# Altium PCB PCB1.PcbDoc
Units mil, origin at the board's own origin, x right, y up, seen from the top; angles counter-clockwise.
Board outline 3600 x 2800 mil, 2 copper layers (Top Layer, Bottom Layer), stack 61.756 mil thick; 47 components, 39 nets, 211 pads, 72 vias.
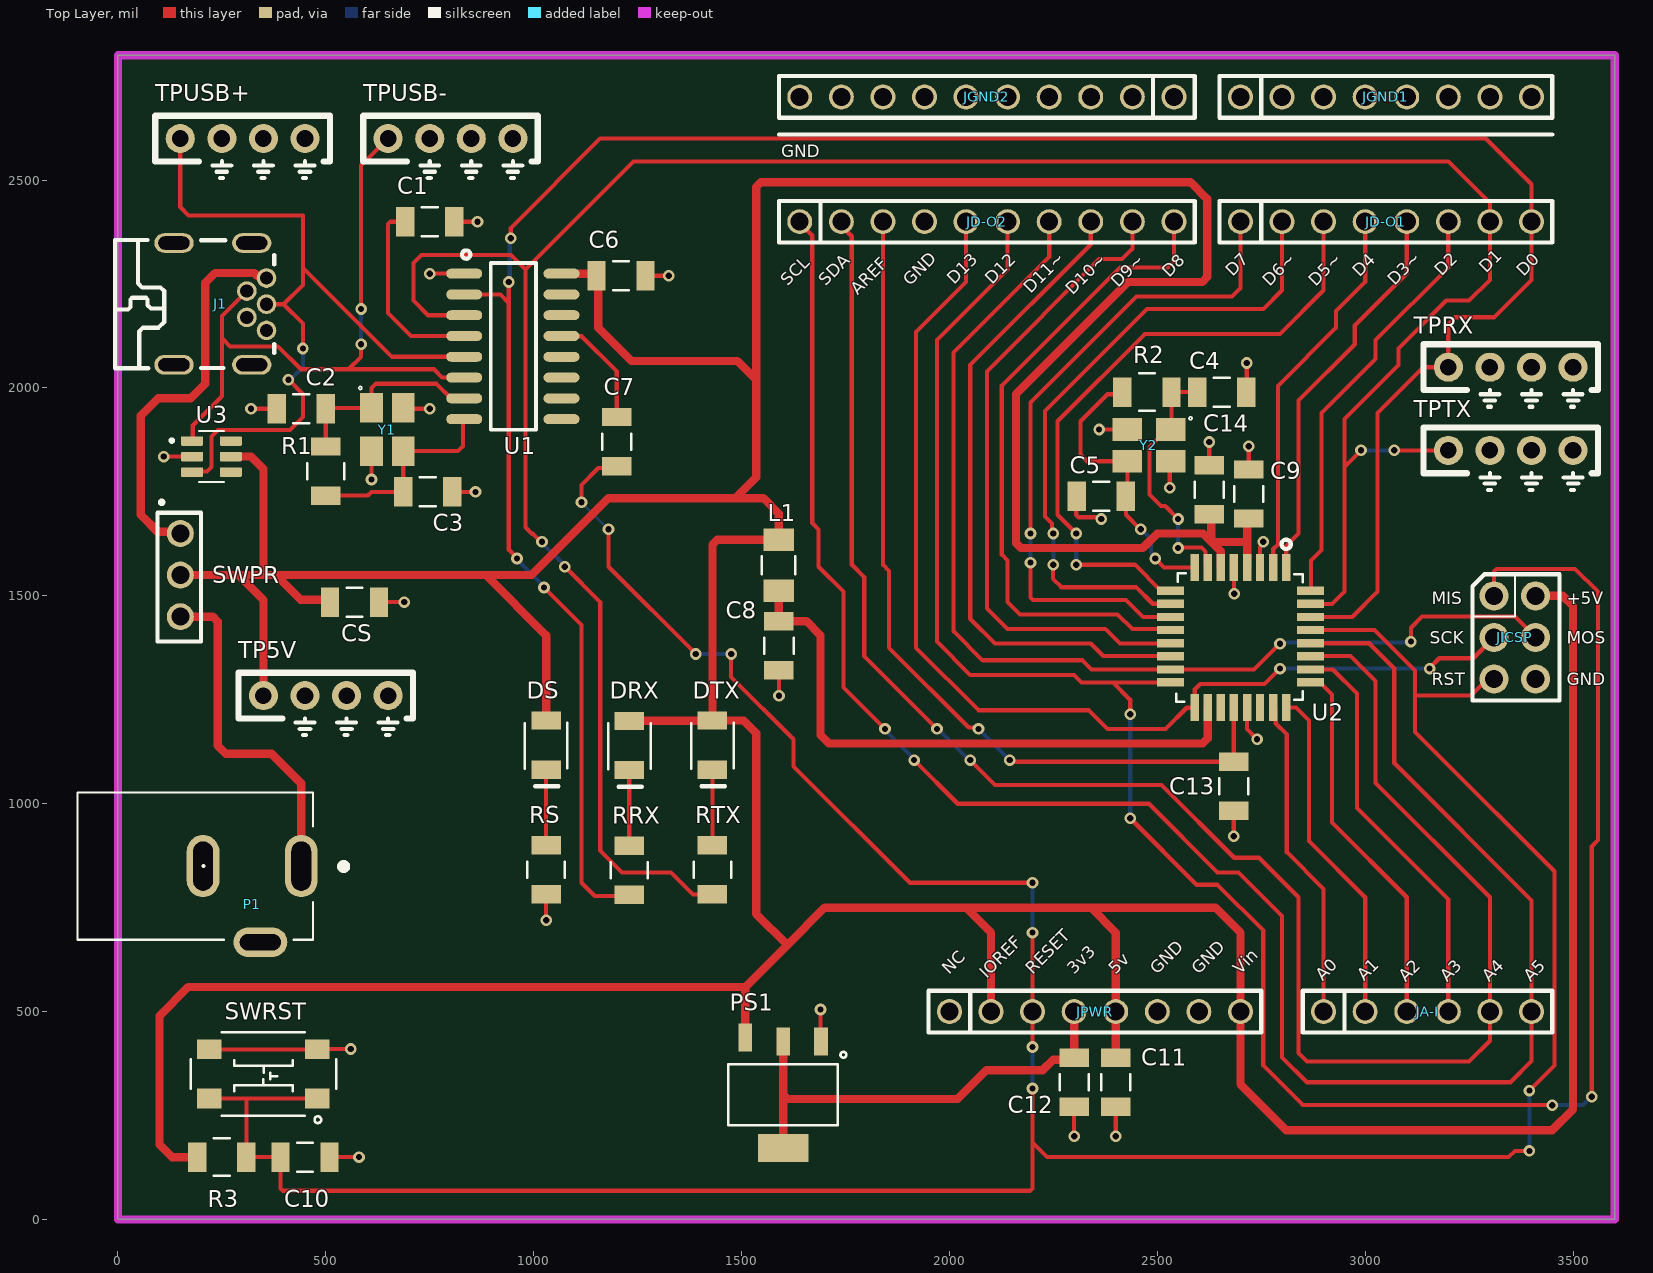
[diagram p0: Top Layer view]
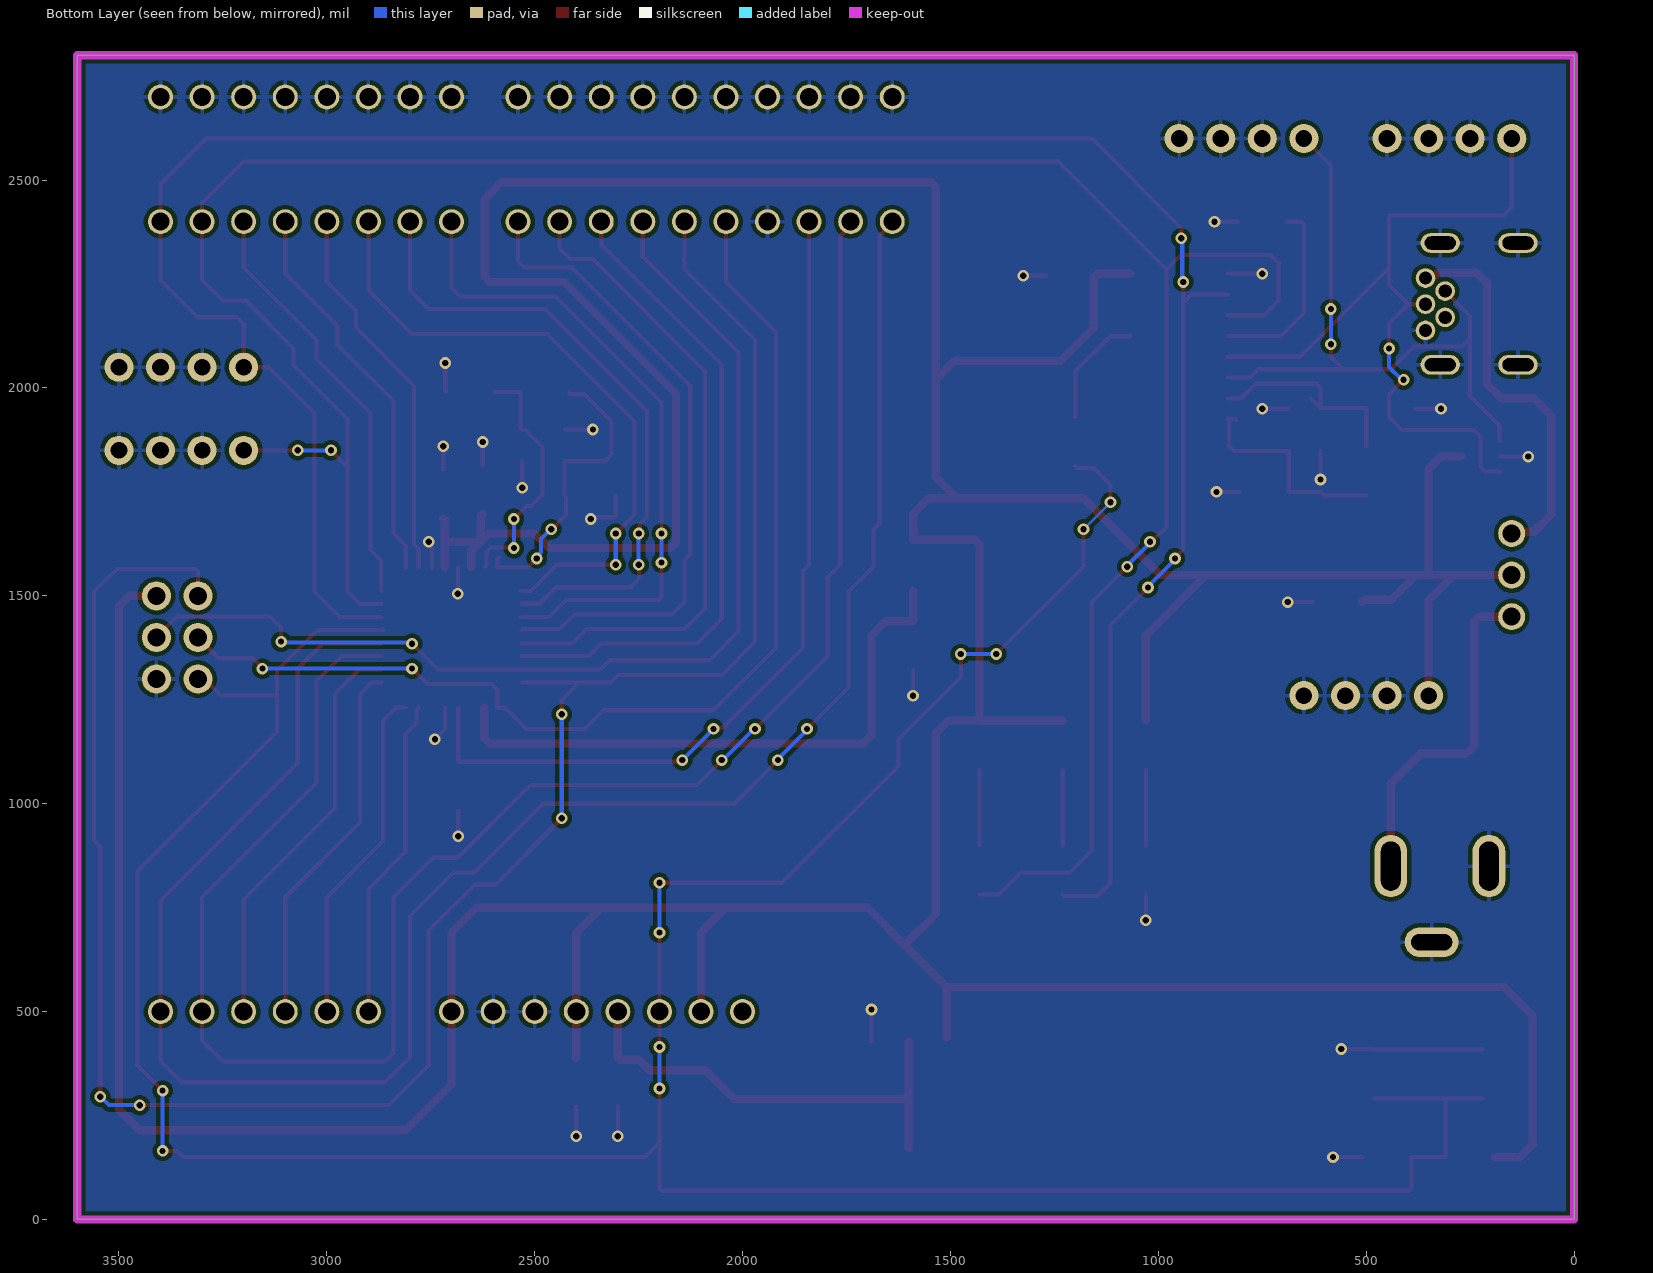
[diagram p1: Bottom Layer view, seen from below]
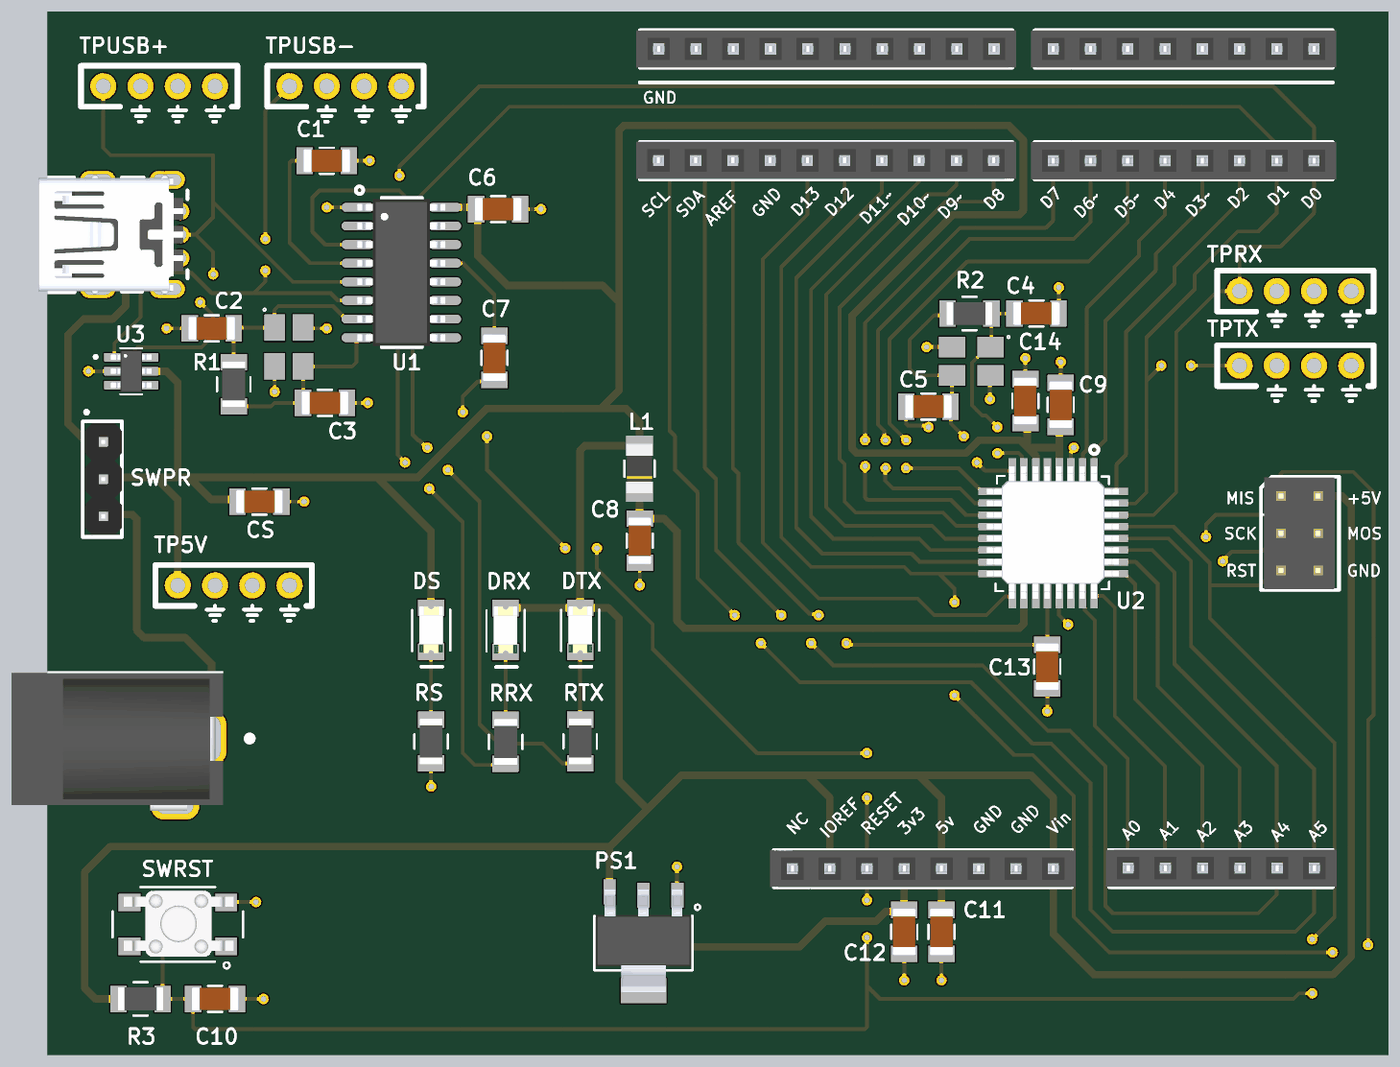
[diagram p2: 3D render of the assembled board from above, using the file's embedded part models]

## Layer stack, top to bottom
Top Solder: solder mask 1, SM-001, Dk 4
Top Layer: signal copper 1.378
Dielectric 1: core 59, Core-043, Dk 4.3
Bottom Layer: signal copper 1.378
Bottom Solder: solder mask 1, SM-001, Dk 4

## Board outline
0,0 3600,0 3600,2800 0,2800

## Design rules (kind name [scope] priority, off if disabled: settings)
BoardOutlineClearance [All] p1: gap=10 ignorepadtopadclearanceinfootprint=FALSE except(0: Arc-SplitContinuation Track-SplitContinuation SMDPad-SplitContinuation THPad-SplitContinuation Via-SplitContinuation Fill-SplitContinuation Poly-SplitContinuation Region-SplitContinuation Text-SplitContinuation)
Clearance [All] p1: gap=10 ignorepadtopadclearanceinfootprint=FALSE
PlaneConnect [All] p1: planeconnectstyle=Direct reliefexpansion=20 reliefentries=4 reliefconductorwidth=10 reliefairgap=10
PolygonConnect [All] p1: thpad.connectstyle=Relief thpad.reliefconductorwidth=10 thpad.reliefentries=4 thpad.polygonreliefangle="90 Angle" thpad.airgapwidth=10 smdpad.connectstyle=Direct smdpad.reliefconductorwidth=10 smdpad.reliefentries=4 smdpad.polygonreliefangle="90 Angle" smdpad.airgapwidth=10 via.connectstyle=Direct via.reliefconductorwidth=10 via.reliefentries=4 via.polygonreliefangle="90 Angle" via.airgapwidth=10
RoutingVias [All] p1: holewidth=15 width=28 viastyle="Through Hole" minholewidth=15 minwidth=28 maxholewidth=60 maxwidth=80
SolderMaskExpansion [All] p1: expansion=4 istentingtop=FALSE
SupplyNets "Schematic Supply Nets_2" [InNet('Vin')] p1: voltage=0.000
SupplyNets "Schematic Supply Nets" [InNet('GND')] p2: voltage=0.000
UnRoutedNet [All] p1: checkbadconnections=TRUE
Width [All] p1: maxlimit=35 minlimit=6 preferedwidth=10 minimp=50.000000 maximp=50.000000 favimp=50.000000
28 further rules are at their usual default settings.

## Classes and differential pairs
component class Power: CS DS J1 P1 RS SWPR TP5V TPUSB+ TPUSB- U3
component class Microcontroller: C1 C2 C3 C4 C5 C6 C7 C8 C9 C10 C11 C12 C13 C14 DRX DTX JA-I JD-O1 JD-O2 JGND1 JGND2 JICSP JPWR L1 PS1 R1 R2 R3 RRX RTX SWRST TPRX TPTX U1 U2 Y1 Y2

## Components (designator, comment, footprint, x,y, rotation, side; value= is the part's Value field where it differs from the comment)
C1 "10uF" 1206_Passive_Capacitor 750,2400 r180 top
C2 "22pF" 1206_Passive_Capacitor 441,1950 r0 top
C3 "22pF" 1206_Passive_Capacitor 745,1750 r180 top
C4 "22pF" 1206_Passive_Capacitor 2655,1990 r180 top
C5 "22pF" 1206_Passive_Capacitor 2365,1740 r0 top
C6 "10uF" 1206_Passive_Capacitor 1210,2270 r180 top
C7 "22uF" 1206_Passive_Capacitor 1200,1871 r270 top
C8 "10uF" 1206_Passive_Capacitor 1590,1380 r90 top
C9 "10uF" 1206_Passive_Capacitor 2720,1745 r90 top
C10 "47nF" 1206_Passive_Capacitor 450,150 r180 top
C11 "22uF" 1206_Passive_Capacitor 2400,330 r90 top
C12 "22uF" 1206_Passive_Capacitor 2300,330 r90 top
C13 "1uF" 1206_Passive_Capacitor 2684,1042 r270 top
C14 "10uF" 1206_Passive_Capacitor 2625,1755 r90 top
CS "10uF" 1206_Passive_Capacitor 569,1485 r180 top
DRX "Red" LED_1206 1230,1140 r270 top
DS "Red" LED_1206 1030,1141 r270 top
DTX "Red" LED_1206 1430,1141 r270 top
J1 "USB Mini" USB_MINI_B 246.14,2202.28 r270 top value="USB mini B"
JA-I "PPTC061LFBN-RC" 6_PIN_ARD-Analog_100mil 2900,500 r0 top value=Female
JD-O1 "PPTC081LFBN-RC" 8_PIN_ARD-DIG_100MIL 2700,2400 r0 top value=Female
JD-O2 "PPTC101LFBN-RC" 10_PIN_ARDUINO_100MIL 1640,2400 r0 top value=Female
JGND1 "PPTC081LFBN-RC" 8_PIN_ARD-DIG_100MIL 2700,2700 r0 top value=Female
JGND2 "PPTC101LFBN-RC" "10_PIN_100MIL - Female" 2540,2700 r180 top value=Female
JICSP "NRPN032PAEN-RC" ICSP 3310,1500 r0 top
JPWR "PPTC081LFBN-RC" 8_PIN_ARD-PWR_100MIL 2000,500 r0 top value=Female
L1 "FB_10uH_1206" AIML-1206_ABR-M 1589.25,1573.5 r90 top
P1 "Power Jack" Power_Jack 440.96,850 r180 top value="CONN PWR JACK 2X5.5MM SOLDER"
PS1 "AMS1117-3.3" LDO 1600,300 r180 top value="IC REG LINEAR 3.3V 800MA SOT223"
R1 "1M" 1206_Passive_Resitor 500,1800 r270 top value="1M Ohm"
R2 "1M" 1206_Passive_Resitor 2475,1990 r180 top value="1M Ohm"
R3 "10k" 1206_Passive_Resitor 250,150 r0 top value=10KOhm
RRX "1k" 1206_Passive_Resitor 1230,840 r90 top value="1K Ohm"
RS "1k" 1206_Passive_Resitor 1030,841 r90 top value="1K Ohm"
RTX "1k" 1206_Passive_Resitor 1430,841 r90 top value="1K Ohm"
SWPR "PREC003SAAN-RC" 3_PIN_100mil 150,1650 r270 top value="CONN HEADER VERT 3POS 2.54MM"
SWRST "TL3305AF160QG" Switch_JLC 350,350 r180 top
TP5V "10x Probe TP" TP10x_Probe 500,1260 r0 top
TPRX "10x Probe TP" TP10x_Probe 3350,2050 r0 top
TPTX "10x Probe TP" TP10x_Probe 3350,1850 r0 top
TPUSB+ "10x Probe TP" TP10x_Probe 300,2600 r0 top
TPUSB- "10x Probe TP" TP10x_Probe 800,2600 r0 top
U1 "CH340G" "USB to serial" 950,2100 r270 top value="USB to Serial"
U2 "ATMEGA328P-ANR" ATMega328P 2700,1400 r90 top value="IC MCU 8BIT 32KB FLASH 32TQFP"
U3 "TESD5V0V4UCX6_RFG" SOT95P280X145-6N 225,1835 r0 top
Y1 "X322512MSB4SI" "Crystal resonator" 650,1900 r270 top value=12MHz
Y2 "X322516MLB4SI" "Crystal resonator" 2480,1860 r180 top value=16MHz

## Footprints (in the part's own frame and the unit in brackets; to place one, negate y for a bottom-side part, rotate by r counter-clockwise, add the part's x,y. Pads: shape width x height; smd on the part's side, far side on the other; paste and mask are expansions set on the pad)
3_PIN_100mil [mm]
  round 1.65 hole 1.1: 1(0,0) 2(2.54,0) 3(5.08,0)
  silkscreen extent -2,-1.4 6.6,1.27, body extent -1.14,-1.27 6.48,1.27, height 8.38
6_PIN_ARD-Analog_100mil [mil]
  round 60 hole 43.31: 1(0,0) 2(100,0) 3(200,0) 4(300,0) 5(400,0) 6(500,0)
  silkscreen extent -50,-50 550,50, body extent -59,-49 561,51, height 335
8_PIN_ARD-DIG_100MIL [mil]
  round 60 hole 43.31: 1(0,0) 2(100,0) 3(200,0) 4(300,0) 5(400,0) 6(500,0) 7(600,0) 8(700,0)
  silkscreen extent -50,-50 750,50, body extent -60,-50 760,50, height 335
8_PIN_ARD-PWR_100MIL [mil]
  round 60 hole 43.31: 1(0,0) 2(100,0) 3(200,0) 4(300,0) 5(400,0) 6(500,0) 7(600,0) 8(700,0)
  silkscreen extent -50,-50 750,50, body extent -60,-50 760,50, height 335
"10_PIN_100MIL - Female" [mil]
  round 60 hole 43.31: 1(0,0) 2(100,0) 3(200,0) 4(300,0) 5(400,0) 6(500,0) 7(600,0) 8(700,0) 9(800,0) 10(900,0)
  silkscreen extent -50,-50 950,50, body extent -61,-50 959,50, height 335
10_PIN_ARDUINO_100MIL [mil]
  round 60 hole 43.31: 1(0,0) 2(100,0) 3(200,0) 4(300,0) 5(400,0) 6(500,0) 7(600,0) 8(700,0) 9(800,0) 10(900,0)
  silkscreen extent -50,-50 950,50, body extent -60,-49 960,51, height 335
1206_Passive_Capacitor [mil]
  rect 44x71 smd: 1(-59,0) 2(59,0)
  silkscreen extent -19,-35 19,35, body extent -63,-31 63,32, height 50
1206_Passive_Resitor [mil]
  rect 44x71 smd: 1(-59,0) 2(59,0)
  silkscreen extent -19,-45 19,45, body extent -61,-31 61,31, height 26
AIML-1206_ABR-M [mil]
  rect 54x73 smd paste+0 mask+0: 1(-61.5,0) 2(61.5,0)
  silkscreen extent -22,-40 22,40, body extent -66,-36 66,36, height 55
ATMega328P [mm]
  rect 1.65x0.508 smd mask+0.025: 1(4.28,-2.794) 2(4.28,-2.007) 3(4.28,-1.194) 4(4.28,-0.406) 5(4.28,0.406) 6(4.28,1.194) 7(4.28,2.007) 8(4.28,2.794) 17(-4.28,2.794) 18(-4.28,2.007) 19(-4.28,1.194) 20(-4.28,0.406) 21(-4.28,-0.406) 22(-4.28,-1.194) 23(-4.28,-2.007) 24(-4.28,-2.794)
  rect 0.508x1.65 smd mask+0.025: 9(2.843,4.28) 10(2.056,4.28) 11(1.243,4.28) 12(0.455,4.28) 13(-0.357,4.28) 14(-1.145,4.28) 15(-1.958,4.28) 16(-2.745,4.28) 25(-2.745,-4.28) 26(-1.958,-4.28) 27(-1.145,-4.28) 28(-0.357,-4.28) 29(0.455,-4.28) 30(1.243,-4.28) 31(2.056,-4.28) 32(2.843,-4.28)
  silkscreen extent -3.94,-3.81 5.97,3.94, body extent -4.45,-4.47 4.55,4.53, height 1.16
"Crystal resonator" [mm]
  rect 1.8x1.4 smd: 1(-1.32,-1.02) 2(1.32,-1.02) 3(1.32,0.92) 4(-1.32,0.92)
  silkscreen extent -2.63,-1.79 -2.45,-1.61, body extent -1.65,-1.2 1.65,1.2, height 0.8
ICSP [mil]
  round 70 hole 43.31: 1(0,0) 2(0,-100) 3(0,-200) 4(100,0) 5(100,-100) 6(100,-200)
  silkscreen extent -52,-252 157,52, body extent -44,-250 146,50, height 330
LDO [mm]
  rect 0.838x1.7 smd: 1(-2.311,-3.25) 2(0,-3.25) 3(2.311,-3.5)
  rect 3.099x1.7 smd: 4(0,3.25)
  silkscreen extent -3.86,-2.62 3.35,1.85, body extent -3.25,-3.65 3.25,3.35, height 1.85
LED_1206 [mil]
  rect 44x71 smd: 1(-59,0) 2(59,0)
  silkscreen extent -54,-51 99,51, body extent -63,-31 63,31, height 28
Power_Jack [mm]
  oval 2x3.8 hole 1.2 slot 3 at 90 deg: 1(0,0) 2(6,0)
  oval 3.3x1.8 hole 1 slot 2.5 at 0 deg: 3(2.5,4.65)
  silkscreen extent -2.79,-4.5 13.68,4.5, body extent -0.76,-4.45 13.64,4.95, height 11.49
SOT95P280X145-6N [mm]
  rrect25% 1.35x0.58 smd: 1(-1.185,0.95) 2(-1.185,0) 3(-1.185,-0.95) 4(1.185,-0.95) 5(1.185,0) 6(1.185,0.95)
  silkscreen extent -2.52,-1.57 0.75,1.57, body extent -1.4,-1.45 1.4,1.45, height 1.45
Switch_JLC [mm]
  rect 1.5x1.2 smd: 1(-3.3,1.5) 2(3.3,1.5) 3(-3.3,-1.5) 4(3.3,-1.5)
  silkscreen extent -4.44,-2.54 4.45,3, body extent -3.8,-2.29 3.7,2.21, height 3.7
TP10x_Probe [mil] "Small Probs footprint"
  round 70 hole 40: 1(-150,0) 2(-50,0) 2(50,0) 2(150,0)
  silkscreen extent -210,-95 210,55
"USB to serial" [mil]
  oval 24x86.61 smd: 1(-175,-117) 2(-125,-117) 3(-75,-117) 4(-25,-117) 5(25,-117) 6(75,-117) 7(125,-117) 8(175,-117) 9(175,117) 10(125,117) 11(75,117) 12(25,117) 13(-25,117) 14(-75,117) 15(-125,117) 16(-175,117)
  silkscreen extent -231,-122 201,56, body extent -197,-118 197,118, height 71
USB_MINI_B [mm]
  round 1.2 hole 0.8: 1(-1.58,2.826) 2(-0.78,1.622) 3(0.02,2.826) 4(0.82,1.622) 5(1.62,2.826)
  oval 1.2x2.4 hole 0.8 slot 1.9 at 90 deg: 6(-3.72,1.924) 7(3.72,1.924) 8(-3.72,-2.826) 9(3.72,-2.826)
  silkscreen extent -3.89,-6.42 3.93,3.3, body extent -4.04,-6.83 4.06,3.02, height 3.98

## Part data
C1 C6 C8 C9 C14 CS: library part C_10uF_1206, "10uF ±10% 50V X5R 1206 Multilayer Ceramic Capacitors MLCC - SMD/SMT RoHS", LCSC Part#=C13585, MFR Part #=CL31A106KBHNNNE, Datasheet=https://datasheet.lcsc.com/lcsc/1810221112_Samsung-Electro-Mechanics-CL31A106KBHNNNE_C13585.pdf, Type=Basic
C2 C3 C4 C5: library part C_22pF_1206, "22pF ±5% 1kV C0G 1206 Multilayer Ceramic Capacitors MLCC - SMD/SMT RoHS", LCSC Part#=C107174, MFR Part #=CC1206JKNPOCBN220, Datasheet=https://datasheet.lcsc.com/lcsc/1810241219_YAGEO-CC1206JKNPOCBN220_C107174.pdf, Type=Extended
C7 C11 C12: library part C_22uF_1206, "22uF ±10% 25V X5R 1206 Multilayer Ceramic Capacitors MLCC - SMD/SMT RoHS", LCSC Part#=C12891, MFR Part #=CL31A226KAHNNNE, Datasheet=https://datasheet.lcsc.com/lcsc/1811031514_Samsung-Electro-Mechanics-CL31A226KAHNNNE_C12891.pdf, Type=basic
C10: library part C_47nF_1206, "47nF ±5% 50V C0G 1206 Multilayer Ceramic Capacitors MLCC - SMD/SMT RoHS", LCSC Part#=C21812, MFR Part #=GRM31M5C1H473JA01L, Datasheet=https://datasheet.lcsc.com/lcsc/1810201313_Murata-Electronics-GRM31M5C1H473JA01L_C21812.pdf, Type=Extended
C13: library part C_1uF_1206, "MULTILAYER CERAMIC CAPACITORS MLCC - SMD/SMT 1UF 50V 1206 ROHS", LCSC Part#=C1848, MFR Part #=CL31B105KBHNNNE, Digikey Link=https://www.digikey.com/product-detail/en/C1206C105M4RACTU/399-8150-1-ND/3471873/?itemSeq=304982366, Type=Basic
DRX DS DTX: library part LED_RED_1206, "Red 621~631nm 1206 Light Emitting Diodes (LED) RoHS", LCSC Part#=C93133, MFR Part #=15-21/R6C-FQ1R1B/2T, Datasheet=https://datasheet.lcsc.com/szlcsc/1811151241_Everlight-Elec-15-21-R6C-FQ1R1B-2T_C93133.pdf, Type=Extended
J1: library part J_USB_B_Mini, "Through Hole USB Connectors RoHS", LCSC Part#=C46398, MFR Part #=920-462A2021D10102, Datasheet=https://datasheet.lcsc.com/szlcsc/2103081233_Jing-Extension-of-the-Electronic-Co-920-462A2021D10102_C46398.pdf, Type=Extended
JA-I: library part JF_6_PIN_FEMA_ARD-Anolog, "6 Position Header Connector 0.100\" (2.54mm) Through Hole Tin", LCSC Part#=C40877, Digikey Link=https://www.digikey.com/product-detail/en/PPTC061LFBN-RC/S7004-ND/810145/?itemSeq=304982353, MFR Part #=PPTC061LFBN-RC, Type=Extended
JD-O1 JGND1: library part JF_8_PIN_FEMA_ARD-Dig, "8 Position Header Connector 0.100\" (2.54mm) Through Hole Tin", LCSC Part#=C27438, Digikey Link=https://www.digikey.com/product-detail/en/PPTC081LFBN-RC/S7006-ND/810147/?itemSeq=304982354, MFR Part #=PPTC081LFBN-RC, Type=Extended
JD-O2: library part JF_10_PIN_FEMA_ARDUINO, "10 Position Header Connector 0.100\" (2.54mm) Through Hole Tin", LCSC Part#=C225507, Digikey Link=https://www.digikey.com/product-detail/en/PPTC101LFBN-RC/S7008-ND/810149/?itemSeq=304982352, MFR Part #=PPTC101LFBN-RC, Type=Extended
JGND2: library part JF_10_PIN_FEMALE_, "10 Position Header Connector 0.100\" (2.54mm) Through Hole Tin", LCSC Part#=C225507, Digikey Link=https://www.digikey.com/product-detail/en/PPTC101LFBN-RC/S7008-ND/810149/?itemSeq=304982352, MFR Part #=PPTC101LFBN-RC, Type=Extended
JICSP: library part J_ICSP, "Connector Header Through Hole 6 position 0.079\" (2.00mm)", LCSC Part#=C124384, Digikey Link=https://www.digikey.com/product-detail/en/NRPN032PAEN-RC/S5801-03-ND/804955/?itemSeq=304982355, MFR Part #=NRPN032PAEN-RC, Type=Extended
JPWR: library part JF_8_PIN_FEMA_ARD-Pwr, "8 Position Header Connector 0.100\" (2.54mm) Through Hole Tin", LCSC Part#=C27438, Digikey Link=https://www.digikey.com/product-detail/en/PPTC081LFBN-RC/S7006-ND/810147/?itemSeq=304982354, MFR Part #=PPTC081LFBN-RC, Type=Extended
L1: "25mA 10uH ±10% 800mΩ 1206  Inductors (SMD) ROHS", LCSC Part#=C1051, MFR Part #=CMI321609X100KT, Mfr_Name="FH (Guangdong Fenghua Advanced Tech)", Datasheet=https://datasheet.lcsc.com/lcsc/1810311314_FH--Guangdong-Fenghua-Advanced-Tech-CMI321609X100KT_C1051.pdf, Type=Basic
P1: library part "P_Power Jack", "Power Barrel Connector Jack 2.10mm ID (0.083\"), 5.50mm OD (0.217\") Through Hole, Right Angle", LCSC Part#=C136744, MFR Part #=PJ-102A, Digikey Link=https://www.digikey.com/product-detail/en/PJ-102A/CP-102A-ND/275425/?itemSeq=304982367, Type=Extended
PS1: library part PS_AMS_LDO_3v3, "LOW DROPOUT REGULATORS(LDO) POSITIVE FIXED 1.3V @ 800MA 15V 3.3V 1A SOT-223 ROHS", LCSC Part#=C6186, MFR Part #=AMS1117-3.3, Type=Basic
R1 R2: library part R_1M_1206, "CHIP RESISTOR - SURFACE MOUNT 1MOHMS ±1% 1/4W 1206 ROHS", LCSC Part#=C17927, MFR Part #=RMCF1206JT1M00, Digikey Link=https://www.digikey.com/product-detail/en/RMCF1206JT1M00/RMCF1206JT1M00CT-ND/1942830/?itemSeq=304982358, Type=Basic
R3: library part R_10KOhm_1206, "10 kOhms ±5% 0.25W, 1/4W Chip Resistor 1206 (3216 Metric) Automotive AEC-Q200 Thick Film", LCSC Part#=C17902, MFR Part #=RMCF1206FT10K0, Digikey Link=https://www.digikey.com/en/products/detail/stackpole-electronics-inc/RMCF1206FT10K0/1759669, Type=Basic
RRX RS RTX: library part R_1K_1206, "CHIP RESISTOR - SURFACE MOUNT 1KOHMS ±1% 1/4W 1206 ROHS", LCSC Part#=C4410, MFR Part #=RNCP1206FTD1K00CT, Digikey Link=https://www.digikey.com/product-detail/en/RNCP1206FTD1K00/RNCP1206FTD1K00CT-ND/2240675/?itemSeq=304982373, Type=Basic
SWPR: library part SW_3Pin_100mil_Switch, "Connector Header Through Hole 3 position 0.100\" (2.54mm)", LCSC Part#=C49257, Digikey Link=https://www.digikey.com/product-detail/en/PREC003SAAN-RC/S1012EC-03-ND/2774851/?itemSeq=304982371, MFR Part #=PREC003SAAN-RC, Type=Extended
SWRST: library part SW_Push_Button_JLC, "Tactile Switch SPST-NO Top Actuated Surface Mount", LCSC Part#=C2837550, MFR Part #=KH-4.5X4.5X4.3H-STM, Datasheet=https://datasheet.lcsc.com/lcsc/2106081532_Shenzhen-Kinghelm-Elec-KH-4.5X4.5X4.3H-STM_C2837550.pdf, Type=Extended
TP5V TPRX TPTX TPUSB+ TPUSB-: library part TP_10x_Probe, "Test Point 300 mil centers"
U1: library part U_USBtoSerial, "Transceiver USB 2.0 2Mbps SOP-16_150mil USB ICs RoHS", LCSC Part#=C14267, Datasheet=https://datasheet.lcsc.com/lcsc/2008191806_WCH-Jiangsu-Qin-Heng-CH340G_C14267.pdf, MFR Part #=CH340G, Type=Basic
U2: library part U_ATMega328P, "AVR AVR® ATmega Microcontroller IC 8-Bit 20MHz 32KB (16K x 16) FLASH 32-TQFP (7x7)", LCSC Part#=C14877, MFR Part #=ATMEGA328P-AU, Digikey Link=https://www.digikey.com/product-detail/en/ATMEGA328P-ANR/ATMEGA328P-ANRCT-ND/2774230/?itemSeq=304982365, Type=Basic
U3: "SOT-26, 5V, 75W, 0.6pF, ESD Protection", Package=None, Check_prices=https://www.snapeda.com/parts/TESD5V0V4UCX6%20RFG/Taiwan+Semiconductor/view-part/?ref=eda, MF="Taiwan Semiconductor", MP="TESD5V0V4UCX6 RFG", SnapEDA_Link=https://www.snapeda.com/parts/TESD5V0V4UCX6%20RFG/Taiwan+Semiconductor/view-part/?ref=snap
Y1: library part X_12MHz_Res, "SMD Crystal Resonators 12MHz ±10ppm SMD-3225_4P RoHS", LCSC Part#=C9002, Datasheet=https://datasheet.lcsc.com/szlcsc/Yangxing-Tech-X322512MSB4SI_C9002.pdf, MFR Part #=X322512MSB4SI, Type=Basic
Y2: library part X_16Mhz_Res, "±10ppm 16000000Hz -40℃~85℃ 贴片无源晶振 60Ω 9pF SMD3225-4P Crystals ROHS", LCSC Part#=C13738, MFR Part #=X322516MLB4SI, Type=Basic

## Via types
v1: diameter 28, hole 15, Top Layer to Bottom Layer, 72 vias

## Nets (pads, with @x,y where several pads share a name; then routed paths per layer and width w, separated by ;. In a path a pad name is that pad's centre, name@x,y a point inside that pad or via, vN(x,y) a via of type N, cw(c..) or ccw(c..) an arc to the next point about the centre after c; other vN are vias at no path point)
3V3: C12.2 JPWR.4 PS1.2 PS1.4 | length 1112.1
  Top Layer w20: PS1.4 1600,300 ; PS1.2 1600,300 ; JPWR.4 C12.2 2295.5,384.5 2250,384.5 2224.5,359 2089,359 2020,290 1610,290 1600,300
12MHz_1: C2.2 R1.1 U1.7 Y1.1 | length 552.5
  Top Layer w10: R1.1 C2.2 501.97,1951.97 Y1.1 ; Y1.1@632.4,1974.53 Y1.1 ; U1.7@803.84,1975 U1.7 801.69,1975 766.69,2010 620,2010 609.84,1999.84 Y1.1
12MHz_2: C3.2 R1.2 U1.8 Y1.3 | length 524.6
  Top Layer w10: R1.2 601,1741 610,1750 C3.2 686.22,1750.22 Y1.3 818.03,1848.03 830,1860 830,1922 U1.8 815,1925 U1.8@812.32,1922.32
16MHz_1: C4.2 R2.1 U2.7 Y2.1 | length 624.8
  Top Layer w10: R2.1@2534,1973 R2.1 ; v1(2550,1615) 2550.98,1615.98 2606.21,1615.98 2616,1606.2 2616,1573.5 U2.7 ; v1(2550,1685) 2519.05,1715.95 2509.05,1715.95 2481.54,1743.46 2481.54,1857.6 2524.09,1900.16 Y2.1 2534,1902.19 R2.1 ; C4.2 2539,1990 R2.1
  Bottom Layer w10: v1(2550,1615) v1(2550,1685)
16MHz_2: C5.2 R2.2 U2.8 Y2.3 | length 728.5
  Top Layer w10: R2.2 2415.86,1989.86 2415.86,1984.86 2379.86,1984.86 2315,1920 2315,1840 2331.22,1823.78 Y2.3 2428.03,1742.03 2425,1739 2425,1695 v1(2460,1660) ; v1(2495,1590) 2516.5,1568.5 U2.8 2590,1588.22 U2.8@2585,1593.22
  Bottom Layer w10: v1(2460,1660) 2461.92,1660 2485,1636.92 2485,1604.86 2495,1594.86 v1(2495,1590)
340_RX: JD-O1.7 RTX.1 TPTX.1 U1.3 U2.31 | length 6249.9
  Top Layer w10: U1.3 746,2175 711,2210 711,2301 730,2320 945,2320 980,2285 ; v1(1020,1630) 1017.43,1630 998.21,1649.22 995.78,1649.22 980,1665 980,2285 ; v1(1075,1570) 1160,1485 1160,887.29 1212.29,835 1330,835 1383,782 RTX.1 ; U2.31 2869.43,1480 2920,1480 2950,1510 2950,1810 ; v1(2990,1850) 2950,1810 ; v1(3070,1850) TPTX.1 ; 980,2285 1240,2545 3200,2545 3300,2445 JD-O1.7 3300,2260 3250,2210 3195,2210 3080,2095 3080,2055 2950,1925 2950,1810
  Bottom Layer w10: v1(1020,1630) 1020,1627.5 1075,1572.5 v1(1075,1570) ; v1(2990,1850) v1(3070,1850)
340_TX: JD-O1.8 RRX.1 TPRX.1 U1.2 U2.30 | length 5894.3
  Top Layer w10: U1.2 920,2225 940,2205 ; v1(940,2255) 940,2205 ; v1(945,2360) 945,2385 1160,2600 3290,2600 3400,2490 JD-O1.8 3400,2260 3310,2170 3215.86,2170 3200,2154.14 TPRX.1 3140,2050 3030,1940 3030,1510 2968.93,1448.93 U2.30 ; v1(960,1590) 960,1591.01 940,1611.01 940,2205 ; v1(1025,1520) 1115,1430 1115,810 1147,778 1227,778 RRX.1
  Bottom Layer w10: v1(940,2255) 942.5,2257.5 942.5,2357.5 v1(945,2360) ; v1(960,1590) 960,1587.5 1025,1522.5 v1(1025,1520)
AREF: C13.1 JD-O2.3 U2.20 | length 2109.2
  Top Layer w10: JD-O2.3@1840,2405 JD-O2.3 1840,1575 1855,1560 1855,1375 2046.56,1183.44 2066.56,1183.44 v1(2070,1180) ; v1(2145,1105) 2149.87,1105 2153.87,1101 C13.1 2684,1105 U2.20
  Bottom Layer w10: v1(2070,1180) v1(2145,1105)
GND: C1.1 C2.1 C3.1 C4.1 C5.1 C6.1 C8.1 C9.2 C10.1 C11.1 C12.1 C13.2 C14.2 CS.1 J1.5 J1.6 J1.7 J1.8 J1.9 JD-O2.4 JGND1.1 JGND1.2 JGND1.3 JGND1.4 JGND1.5 JGND1.6 JGND1.7 JGND1.8 JGND2.1 JGND2.2 JGND2.3 JGND2.4 JGND2.5 JGND2.6 JGND2.7 JGND2.8 JGND2.9 JGND2.10 JICSP.6 JPWR.6 JPWR.7 P1.2 P1.3 PS1.1 RS.1 SWRST.3 SWRST.4 TP5V.2 TPRX.2 TPTX.2 TPUSB+.2 TPUSB-.2 U1.1 U2.3 U2.5 U2.21 U3.2 Y1.2 Y1.4 Y2.2 Y2.4 | length 2030.1
  Top Layer w10: v1(110,1835) U3.2 ; SWRST.4 SWRST.3 480.87,410 v1(560,410) ; v1(320,1950) C2.1 ; C10.1 v1(580,150) ; Y1.2 610,1847.87 v1(610,1780) ; CS.1 v1(689,1485) ; Y1.4 688.19,1950 v1(750,1950) ; v1(750,2275) U1.1 ; C3.1 v1(860,1750) ; C1.1 v1(865,2400) ; v1(1030,720) RS.1 ; C6.1 v1(1325,2270) ; v1(1590,1260) C8.1 ; v1(1690,505) 1690,428.95 PS1.1 ; v1(2300,200) C12.1 ; C5.1 2305,1739 2305,1694.86 2310.86,1689 2356.13,1689 2360.13,1685 v1(2365,1685) ; v1(2360,1900) 2427.87,1900 Y2.2 ; v1(2400,200) C11.1 ; v1(2530,1760) 2530,1821.81 Y2.4 ; C14.2 v1(2625,1870) ; v1(2684,922) C13.2 ; U2.5 2684.5,1568 2684.5,1505.5 v1(2685,1505) ; C4.1 2715,1991 v1(2715,2060) ; U2.21 2715.5,1231 2715.5,1179.5 v1(2740,1155) ; C9.2 v1(2720,1860) ; U2.3 2747,1617.13 2755,1625.13 v1(2755,1630)
MISO: JD-O2.6 JICSP.1 U2.16 | length 5177.6
  Top Layer w10: JD-O2.6 2140,2315 2140.86,2314.14 2140.86,2305.86 2140,2305 2140,2285 1970,2115 1970,1390 2050,1310 2300,1310 2318.07,1291.93 2393.07,1291.93 ; v1(2435,965) 2595,805 2645,805 2755,695 2755,370 2850,275 v1(3450,275) ; v1(2435,1215) 2435,1250 2393.07,1291.93 ; U2.16 2393.07,1291.93 ; JICSP.1 3310,1559.14 3315.86,1565 3505,1565 3560,1510 3560,912.44 3545,897.44 v1(3545,295)
  Bottom Layer w10: v1(2435,965) v1(2435,1215) ; v1(3450,275) 3523.99,275 3543.99,295 v1(3545,295)
MOSI: JD-O2.7 JICSP.5 U2.15 | length 2611.5
  Top Layer w10: JD-O2.7 2240,2315 2010,2085 2010,1415 2080,1345 2320,1345 2342.07,1322.93 U2.15 2732.93,1322.93 v1(2795,1385) ; v1(3110,1390) 3109.86,1390.14 3109.86,1423.38 3136.48,1450 3360,1450 JICSP.5
  Bottom Layer w10: v1(2795,1385) 2797.5,1387.5 3107.5,1387.5 v1(3110,1390)
NetC1_2: C1.2 U1.4 | length 463.4
  Top Layer w10: C1.2 655.86,2400 650,2394.14 650,2180 705,2125 U1.4
NetC7_1: C7.1 U1.13 | length 278.2
  Top Layer w10: U1.13 1067.75,2124.25 1115.75,2124.25 1200,2040 C7.1
NetC8_2: C8.2 L1.1 U2.18 | length 1445.3
  Top Layer w20: C8.2@1589.25,1439.75 L1.1 ; C8.2 1656,1439 1690,1405 1690,1165 1710,1145 2609.28,1145 2621,1156.72 U2.18
NetDRX_2: DRX.2 RRX.2 | length 182
  Top Layer w10: RRX.2 DRX.2
NetDS_2: DS.2 RS.2 | length 182
  Top Layer w10: RS.2 DS.2
NetDTX_2: DTX.2 RTX.2 | length 182
  Top Layer w10: RTX.2 DTX.2
NetJ1_1: J1.1 SWPR.1 | length 943.8
  Top Layer w20: SWPR.1 145.82,1654.18 95.82,1654.18 55,1695 55,1933.28 96.72,1975 175,1975 210,2010 210,2252.76 233.85,2276.61 328.07,2276.61 334.99,2269.69 352.18,2269.69 J1.1
NetJA-I_1: JA-I.1 U2.23 | length 781.6
  Top Layer w10: U2.23 2784,1226.5 2784,1199.16 2785,1198.16 2785,1192.8 2811.56,1166.25 2811.56,883.44 2900,795 JA-I.1
NetJA-I_2: JA-I.2 U2.24 | length 824
  Top Layer w10: U2.24 2833.5,1231.5 2865,1200 2865,910 3000,775 JA-I.2
NetJA-I_3: JA-I.3 U2.25 | length 901
  Top Layer w10: U2.25 2890.98,1291.93 2920,1262.91 2920,955 3100,775 JA-I.3
NetJA-I_4: JA-I.4 U2.26 | length 991.6
  Top Layer w10: U2.26 2922.07,1322.93 2980,1265 2980,990 3200,770 JA-I.4
NetJD-O1_1: JD-O1.1 U2.11 | length 1608.1
  Top Layer w10: v1(2195,1580) 2195,1495.86 2200.86,1490 2425,1490 2466.07,1448.93 U2.11 ; v1(2195,1650) 2195,1965 2450,2220 2680,2220 2700,2240 2700,2390 2695,2395 JD-O1.1
  Bottom Layer w10: v1(2195,1580) v1(2195,1650)
NetJD-O1_2: JD-O1.2 U2.10 | length 1575.2
  Top Layer w10: v1(2250,1575) 2249,1574 2249,1541 2269.14,1520.86 2449.14,1520.86 2489.07,1480.93 U2.10 ; v1(2250,1650) 2246.56,1653.44 2246.56,1674.24 2230,1690.8 2230,1945 2475,2190 2755,2190 2800,2235 JD-O1.2
  Bottom Layer w10: v1(2250,1575) v1(2250,1650)
NetJD-O1_3: JD-O1.3 U2.9 | length 1556.7
  Top Layer w10: v1(2305,1575) 2445.95,1575 2509.02,1511.93 U2.9 ; v1(2305,1650) 2260,1695 2260,1920 2470,2130 2795,2130 2900,2235 JD-O1.3
  Top Layer w20: JD-O1.3@2900,2395 JD-O1.3
  Bottom Layer w10: v1(2305,1575) v1(2305,1650)
NetJD-O1_4: JD-O1.4 U2.2 | length 923
  Top Layer w10: U2.2 2779,1612.99 2790,1623.99 2790,2005 2930,2145 2930,2185 3000,2255 JD-O1.4
NetJD-O1_5: JD-O1.5 U2.1 | length 951.6
  Top Layer w10: U2.1 2810,1620 2840,1650 2840,1970 2975,2105 2975,2150 3100,2275 JD-O1.5
NetJD-O1_6: JD-O1.6 U2.32 | length 1029.5
  Top Layer w10: U2.32 2870,1513.43 2870,1585 2895,1610 2895,1940 3025,2070 3025,2115 3200,2290 3200,2390 3195,2395 JD-O1.6
NetJD-O2_8: JD-O2.8 U2.14 | length 1593.9
  Top Layer w10: JD-O2.8 2340,2345 2050,2055 2050,1445 2110,1385 2340,1385 2370,1355 2531.43,1355 U2.14
NetJD-O2_9: JD-O2.9 U2.13 | length 1584.3
  Top Layer w10: JD-O2.9 2440,2335 2415,2310 2360,2310 2090,2040 2090,1470 2140,1420 2375,1420 2410,1385 2530.57,1385 U2.13
NetJD-O2_10: JD-O2.10 U2.12 | length 1578.9
  Top Layer w10: U2.12 2529.43,1420 2440,1420 2404.51,1455.49 2169.51,1455.49 2140,1485 2140,1585 2126,1599 2126,2006 2410,2290 2525,2290 2540,2305 JD-O2.10
NetP1_1: P1.1 SWPR.3 | length 830.8
  Top Layer w20: SWPR.3 228.28,1450 240,1438.28 240,1140 260,1120 370,1120 440.96,1049.04 P1.1
Reset: C7.2 C10.2 JICSP.3 JPWR.3 R3.2 SWRST.1 SWRST.2 U2.29 | length 7876.8
  Top Layer w6: U2.29@2866.43,1420 U2.29
  Top Layer w10: SWRST.2 310,290.94 ; SWRST.1 310,290.94 ; v1(1115,1725) 1115,1767 1155.36,1807.36 1195.36,1807.36 C7.2 ; v1(1180,1660) 1180,1570 v1(1390,1360) ; v1(1475,1360) 1475,1305 1625,1155 1625,1090 1905,810 v1(2200,810) ; v1(2200,315) 2200,185 ; v1(2200,415) JPWR.3 v1(2200,690) ; U2.29@2864.36,1417.93 U2.29@2866.43,1420 ; U2.29 3022.07,1417.93 3120,1320 3120,1260 ; 3120,1172.5 3170,1122.5 ; 3120,1173.5 3120,1260 ; 3170.71,1121.79 3455,837.5 3455,370 v1(3395,310) ; JICSP.3 3294.14,1300 3254.14,1260 3120,1260 ; v1(3395,165) 3360,165 3345,150 2235,150 2200,185 ; 310,290.94 309,289.94 R3.2 C10.2 391,74.86 396.86,69 2194.14,69 2200,74.86 2200,185
  Bottom Layer w6: v1(1115,1725) v1(1180,1660)
  Bottom Layer w10: v1(1390,1360) v1(1475,1360) ; v1(2200,315) v1(2200,415) ; v1(2200,690) v1(2200,810) ; v1(3395,165) v1(3395,310)
SCK: JD-O2.5 JICSP.2 U2.17 | length 2663
  Top Layer w10: JD-O2.5 2040,2255 1920,2135 1920,1375 2070,1225 2335,1225 2380,1180 2520,1180 2570.86,1230.86 2589.36,1230.86 U2.17 2590,1274.59 2603.28,1287.87 2757.87,1287.87 v1(2795,1325) ; v1(3155,1325) 3155,1326.92 3178.08,1350 3260,1350 JICSP.2
  Bottom Layer w10: v1(2795,1325) v1(3155,1325)
SCL: JA-I.6 JD-O2.1 U2.28 | length 4742.7
  Top Layer w10: JD-O2.1 1640,2396.36 1670,2366.36 1670,1675 1685,1660 1685,1570 1745,1510 1745,1280 v1(1845,1180) ; v1(1915,1105) 2020,1000 2480,1000 2645,835 2695,835 2800,730 2800,390 2860,330 3349.14,330 3400,380.86 JA-I.6 3400,767.5 3070,1097.5 3070,1325 3009.07,1385.93 U2.28
  Bottom Layer w10: v1(1845,1180) 1845,1177.5 1915,1107.5 v1(1915,1105)
SDA: JA-I.5 JD-O2.2 U2.27 | length 4381.4
  Top Layer w10: JD-O2.2 1735,2395 1765,2365 1765,1575 1795,1545 1795,1355 v1(1970,1180) ; v1(2050,1105) 2110,1045 2510,1045 2685,870 2745,870 2840,775 2840,400 2860,380 3250,380 3300,430 JA-I.5 3300,775 3025,1050 3025,1295 2965.07,1354.93 U2.27
  Bottom Layer w10: v1(1970,1180) 1972.5,1180 2047.5,1105 v1(2050,1105)
USB_D+: J1.3 TPUSB+.1 U1.5 U3.3 | length 1905.6
  Top Layer w10: TPUSB+.1 150,2435 170,2415 445,2415 445,2288.99 ; U3.3 180.2,1799.45 214.03,1799.45 225,1810.42 225,1883.28 240.54,1898.82 413.82,1898.82 445,1930 445,1985 v1(410,2020) ; J1.3 398.51,2201.49 ; v1(445,2095) 445,2155 398.51,2201.49 ; U1.5 658.99,2075 445,2288.99 ; 398.51,2201.49 445,2247.98 445,2288.99
  Bottom Layer w10: v1(410,2020) 414.87,2020 432.46,2037.59 432.59,2037.59 445,2050 v1(445,2095)
USB_D-: J1.2 TPUSB-.1 U1.6 U3.1 | length 1631.8
  Top Layer w10: U3.1 180,1874.06 180,1910 250,1980 250,2120 ; J1.2 250,2172.99 250,2120 ; v1(585,2105) 585,2075 555,2045 ; v1(585,2190) 585,2535 TPUSB-.1 ; U1.6 779.98,2025 759.98,2045 555,2045 ; 250,2120 270,2100 341.27,2100 341.39,2099.88 385.12,2099.88 440,2045 555,2045
  Bottom Layer w10: v1(585,2105) v1(585,2190)
Vin: C6.2 C9.1 C11.2 C14.1 CS.2 DRX.1 DS.1 DTX.1 JICSP.4 JPWR.2 JPWR.5 JPWR.8 L1.2 PS1.3 R3.1 SWPR.2 TP5V.1 U1.16 U2.4 U2.6 U3.5 | length 15229.8
  Top Layer w20: SWPR.2 290,1550 ; R3.1 130,150 100,180 100,490 169,559 1509,559 ; U3.5 320,1835 350,1805 350,1550 ; TP5V.1 350,1490 290,1550 ; CS.2 504,1491 439,1491 380,1550 ; DS.1 1030,1405 885,1550 ; U1.16 1146,2275 C6.2@1155,2266 ; C6.2 C6.2@1155,2266 ; DRX.1 1230.5,1199.5 1429.5,1199.5 DTX.1 ; PS1.3 1509,559 ; JPWR.2 2100,690 2040,750 ; C11.2 JPWR.5 2400,690 2340,750 ; C14.1 2630,1691 2630,1630.27 2630.63,1629.63 ; U2.6 2653,1607.14 2651,1609.14 2651,1609.27 2630.63,1629.63 ; U2.4 2716,1627.25 ; C9.1 2716,1682 2716,1627.25 ; JICSP.4 3475.23,1500 3500,1475.23 3500,265 3450,215 2810,215 2700,325 JPWR.8 2700,690 2640,750 2340,750 ; 290,1550 350,1550 ; 350,1550 380,1550 ; 380,1550 885,1550 ; 885,1550 995,1550 1180,1735 1485,1735 ; C6.2@1155,2266 1155,2144.98 1234.98,2065 1490,2065 1535,2020 ; DTX.1 1430,1623.28 1441.72,1635 L1.2 1589.25,1698.28 1552.53,1735 1485,1735 ; DTX.1 1505,1200 1535,1170 1535,735 1610,660 ; 1485,1735 1535,1785 1535,2020 ; 1509,559 1610,660 ; 1535,2020 1535,2483.28 1546.72,2495 2580,2495 2620,2455 2620,2266.72 2608.28,2255 2430,2255 2160,1985 2160,1626.72 2171.72,1615 2465,1615 2500,1650 2610.27,1650 2630.63,1629.63 ; 1610,660 1700,750 2040,750 ; 2040,750 2340,750 ; 2630.63,1629.63 2713.62,1629.63 2716,1627.25
pads on no net: J1.4 JPWR.1 U1.9 U1.10 U1.11 U1.12 U1.14 U1.15 U2.19 U2.22 U3.4 U3.6

## Polygon pours and split planes (outlines as drawn)
GND on Bottom Layer "GND_L02_P000" (solid, pour order 0): 0,2800 3600,2800 3600,0 0,0

## Keep-outs
Keep-Out Layer:
  the board outline again, w20

## Silkscreen, mask and mechanical layers (free items; w line width, h text height)
Top Overlay:
  lines w10: 1590,2610 3450,2610
  text "GND" at 1595,2555 h30
  text "MIS" at 3160,1480 h30
  text "+5V" at 3485,1480 h30
  text "SCK" at 3155,1385 h30
  text "MOS" at 3485,1385 h30
  text "RST" at 3160,1285 h30
  text "GND" at 3485,1285 h30

## Text inside footprints (layer, text, board x,y; h text height)
JA-I: Top Overlay "A5" at 3398,569.07 h30 r45; Top Overlay "A4" at 3298,569.07 h30 r45; Top Overlay "A3" at 3198,569.07 h30 r45; Top Overlay "A2" at 3098,569.07 h30 r45; Top Overlay "A0" at 2898,572 h30 r45; Top Overlay "A1" at 2998,572 h30 r45
JD-O1: Top Overlay "D7" at 2681,2266.81 h30 r45; Top Overlay "D6~" at 2771,2242.07 h30 r45; Top Overlay "D4" at 2987,2265 h30 r45; Top Overlay "D3~" at 3071,2245 h30 r45; Top Overlay "D2" at 3184,2267 h30 r45; Top Overlay "D1" at 3291,2275 h30 r45; Top Overlay "D0" at 3381,2266.81 h30 r45; Top Overlay "D5~" at 2881,2242.07 h30 r45
JD-O2: Top Overlay "D8" at 2529,2264.41 h30 r45; Top Overlay "D9~" at 2406,2239.67 h30 r45; Top Overlay "D10~" at 2297,2222 h30 r45; Top Overlay "D11~" at 2196,2225.53 h30 r45; Top Overlay "D12" at 2103,2246.74 h30 r45; Top Overlay "D13" at 2012,2246.74 h30 r45; Top Overlay "GND" at 1906,2243.21 h30 r45; Top Overlay "AREF" at 1779,2222 h30 r45; Top Overlay "SDA" at 1703,2243.21 h30 r45; Top Overlay "SCL" at 1611,2243.21 h30 r45
JPWR: Top Overlay "RESET" at 2200,587.07 h30 r45; Top Overlay "Vin" at 2700,587.07 h30 r45; Top Overlay "GND" at 2600,587.07 h30 r45; Top Overlay "GND" at 2500,587.07 h30 r45; Top Overlay "5v" at 2400,587.07 h30 r45; Top Overlay "3v3" at 2300,587.07 h30 r45; Top Overlay "IOREF" at 2090,578.39 h30 r45; Top Overlay "NC" at 2000,587.07 h30 r45